# EAGLE board Weather Station using ThingSpeak  (EAGLE 9.7.0)

Size 287.48 x 112.43 mm. Coordinates in mm from the lower left corner, seen from the top.
Outline: 0,0 287.48,0 287.48,112.43 0,112.43 0,0
Copper layers (1*16): Top 0.035mm / dielectric 1.5mm / Bottom 0.035mm
Design rules "default": minimum track width 6mil, minimum drill 0.35mm, track to track 6mil, track to pad 6mil, pad to pad 6mil, via to via 6mil, smd to smd 6mil, copper to edge 40mil, drill to drill 6mil, minimum pad ring 10mil, minimum via ring 8mil, stop-mask expansion 4mil, vias tented up to drill 0mil, thermal gap 10mil

## Footprints (pad centres in the part's own frame; a part is rotated, then mirrored left to right if it is on the bottom)
MQ-XX-SOCKET = drill 1.27: 1 -6.223,6.223; 2 -8.788,0; 3 -6.223,-6.223; 4 6.223,-6.223; 5 8.788,0; 6 6.223,6.223
GL5528 = drill 0.8 pad 1.4: 1 -1.702,0; 2 1.702,0
RESAD1016W63L850D250B = drill 0.83 pad 1.43: 1 -5.08,0; 2 5.08,0
HA-06-SM065 = drill 1 pad 1.676: 1 -2.54,-2.54; 2 0,2.54; 3 2.54,-2.54
JHD-162A = drill 1.016 long: 1 -19.05,0; 2 -16.51,0; 3 -13.97,0; 4 -11.43,0; 5 -8.89,0; 6 -6.35,0; 7 -3.81,0; 8 -1.27,0; 9 1.27,0; 10 3.81,0; 11 6.35,0; 12 8.89,0; 13 11.43,0; 14 13.97,0; 15 16.51,0; 16 19.05,0
ARDUINO-UNO-R3-SHIELD = drill 1.016 pad 1.88: 3.3V 24.13,-2.54; 5V 24.13,0; A0 24.13,12.7; A1 24.13,15.24; A2 24.13,17.78; A3 24.13,20.32; A4 24.13,22.86; A5 24.13,25.4; AREF -24.13,-13.97; D2 -24.13,20.32; D3 -24.13,17.78; D4 -24.13,15.24; D5 -24.13,12.7; D6 -24.13,10.16; D7 -24.13,7.62; D8 -24.13,3.81; D9 -24.13,1.27; D10 -24.13,-1.27; D11 -24.13,-3.81; D12 -24.13,-6.35; D13 -24.13,-8.89; GND@0 24.13,2.54; GND@1 24.13,5.08; GND@2 -24.13,-11.43; IOREF 24.13,-7.62; NC 24.13,-10.16; RES 24.13,-5.08; RX -24.13,25.4; SCL -24.13,-19.05; SDA -24.13,-16.51; TX -24.13,22.86; VIN 24.13,7.62
TO92 = drill 0.813 octagon: 1 -1.27,0; 2 0,1.905; 3 1.27,0
1X08 = drill 1.016 long: 1 -8.89,0; 2 -6.35,0; 3 -3.81,0; 4 -1.27,0; 5 1.27,0; 6 3.81,0; 7 6.35,0; 8 8.89,0

## Placement (x,y rotation side)
GAS1  GAS-SENSORMQ-XX-SOCKET  [MQ-XX-SOCKET]  273.26,81.18 270 top
R1  PHOTOCELL_GL5528  [GL5528]  228.81,92.61 0 top
R2  4k  [RESAD1016W63L850D250B]  268.18,100.23 90 top
R3  10k  [RESAD1016W63L850D250B]  227.54,79.91 90 top
R4  1k  [RESAD1016W63L850D250B]  6.33,19.13 90 top
R5  1k  [RESAD1016W63L850D250B]  6.33,8.97 90 top
R6  220  [RESAD1016W63L850D250B]  163.11,97.7 270 top
RPOT2  250k  [HA-06-SM065]  122.47,72.3 0 top
U1  LCD-16X2JHD-162A  [JHD-162A]  144.67,50.07 0 top
U2  ARDUINO-UNO-R3-SHIELD  [ARDUINO-UNO-R3-SHIELD]  59.53,82.58 270 top
U3  TMP36GT9Z_TO92  [TO92]  252.94,95.15 0 top
U4  PINHD-1X08_1X08M  [1X08]  40.53,23.68 0 top

## Library data of the parts
GAS1 R1-R6 RPOT2 U1-U4 = Tinkercad

## Nets
R5_2: R4.1 R5.2 U4.8
U1_LED+: R6.2 U1.15
U1_VO: RPOT2.2 U1.3
U2_3.3V: U2.3.3V U4.1 U4.4 U4.5
U2_5V: GAS1.4 GAS1.5 GAS1.6 R1.2 R6.1 RPOT2.1 U1.2 U2.5V U3.3
U2_A0: GAS1.1 GAS1.3 R2.1 U2.A0
U2_A1: U2.A1 U3.2
U2_A2: R1.1 R3.2 U2.A2
U2_D2: U1.14 U2.D2
U2_D3: U1.13 U2.D3
U2_D4: U1.12 U2.D4
U2_D5: U1.11 U2.D5
U2_D11: U1.6 U2.D11
U2_D12: U1.4 U2.D12
U2_GND: GAS1.2 R2.2 R3.1 R5.1 RPOT2.3 U1.1 U1.5 U1.16 U2.GND@0 U2.GND@1 U2.GND@2 U3.1 U4.2
U2_TX: R4.2 U2.TX
U4_3: U2.RX U4.3

## Tracks (layer width: path | path; a pad name or v marks a point on that pad's centre or on a via)
R5_2  (2 unrouted)
U1_LED+  (1 unrouted)
U1_VO  (1 unrouted)
U2_3.3V  (3 unrouted)
U2_5V  (8 unrouted)
U2_A0  (3 unrouted)
U2_A1  (1 unrouted)
U2_A2  (2 unrouted)
U2_D2  (1 unrouted)
U2_D3  (1 unrouted)
U2_D4  (1 unrouted)
U2_D5  (1 unrouted)
U2_D11  (1 unrouted)
U2_D12  (1 unrouted)
U2_GND  (12 unrouted)
U2_TX  (1 unrouted)
U4_3  (1 unrouted)